# EAGLE board gadtoanalog (EAGLE 6.2)
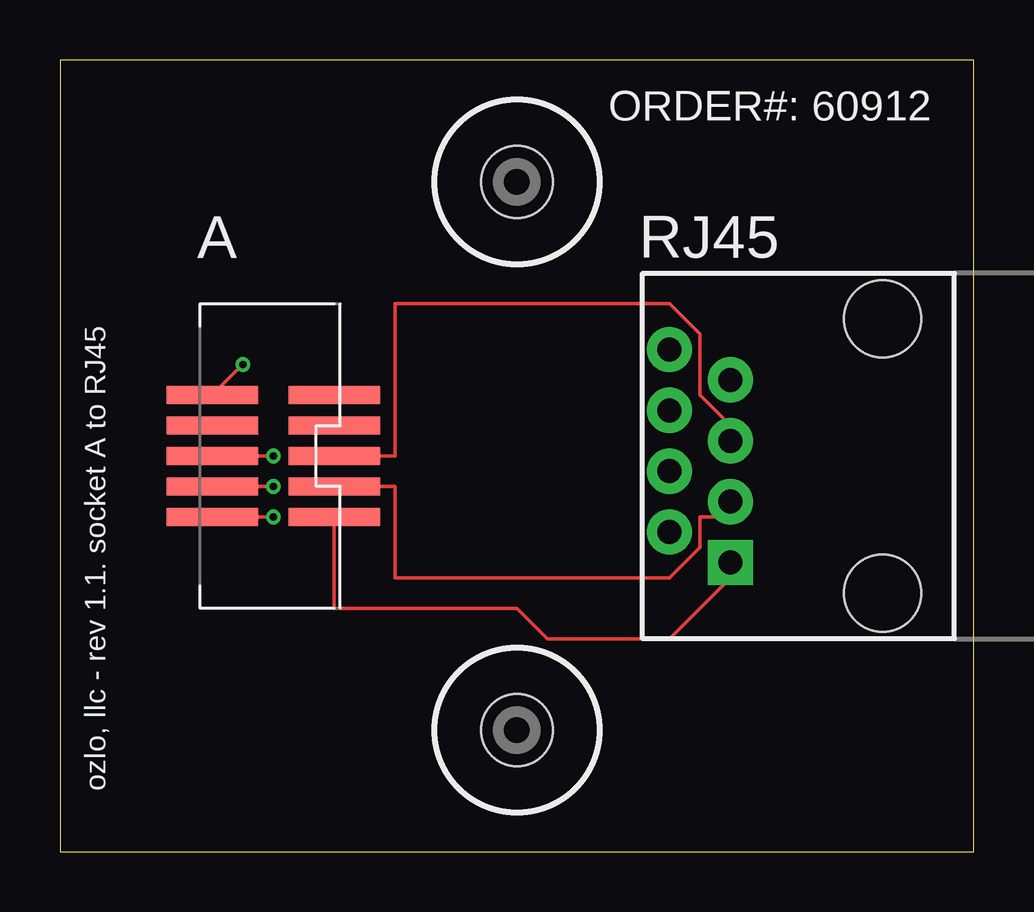
[diagram p0: board, top side]
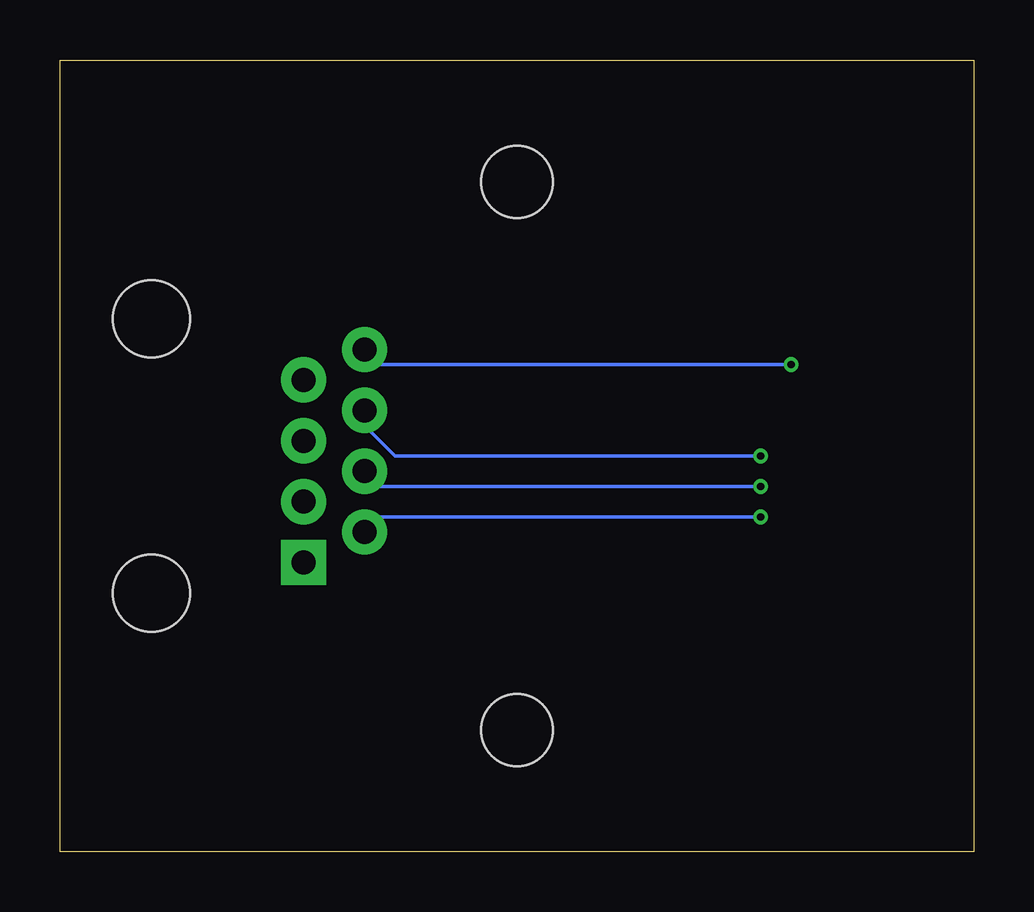
[diagram p1: board, bottom side, seen from below]

Size 38.1 x 33.02 mm. Coordinates in mm from the lower left corner, seen from the top.
Outline: 0,0 38.1,0 38.1,33.02 0,33.02 0,0
Copper layers (1*16): Top 0.035mm / dielectric 1.5mm / Bottom 0.035mm
Design rules: minimum track width 6mil, minimum drill 12mil, track to track 6mil, track to pad 6mil, pad to pad 6mil, via to via 6mil, smd to smd 0mil, copper to edge 10mil, drill to drill 10mil, minimum pad ring 10mil, minimum via ring 6mil, stop-mask expansion 2mil, vias tented up to drill 100mil, thermal gap 10mil

## Footprints (pad centres in the part's own frame; a part is rotated, then mirrored left to right if it is on the bottom)
SHF105DSM = smd 3.81 x 0.737: 1 -2.54,2.54; 2 2.54,2.54; 3 -2.54,1.27; 4 2.54,1.27; 5 -2.54,0; 6 2.54,0; 7 -2.54,-1.27; 8 2.54,-1.27; 9 -2.54,-2.54; 10 2.54,-2.54
RJ45-8 = drill 1 pad 1.88 square: 1 -4.445,6.35 | drill 1 pad 1.88: 2 -3.175,8.89; 3 -1.905,6.35; 4 -0.635,8.89; 5 0.635,6.35; 6 1.905,8.89; 7 3.175,6.35; 8 4.445,8.89 | hole 3.2: -5.715,0; 5.715,0
DRIL-3 = hole 3: 0,0

## Placement (x,y rotation side)
U$1  SHF105SM  [SHF105DSM]  8.89,16.51 180 top
U$2  RJ45-8PTH  [RJ45-8]  34.29,16.51 90 top
U$3  [DRIL-3]  19.05,5.08 0 top
U$4  [DRIL-3]  19.05,27.94 0 top

## Library data of the parts
U$1 = ozlollc
U$2 = SparkFun-Connectors
U$3 U$4 = special

## Nets
+3V3: U$1.1 U$2.1
+5V: U$1.2 U$2.2
GND: U$1.10 U$2.8
N$1: U$1.3 U$2.3
N$2: U$1.4 U$2.4
N$3: U$1.5 U$2.5
N$4: U$1.6 U$2.6

## Tracks (layer width: path | path; a pad name or v marks a point on that pad's centre or on a via)
+3V3
  Top 0.152: U$1.1 11.43,10.16 19.05,10.16 20.32,8.89 25.4,8.89 27.94,11.43 U$2.1
+5V  (via drill 0.3)
  Top 0.152: U$1.2 v8.89,13.97
  Bottom 0.152: v8.89,13.97 25.4,13.97 U$2.2
GND  (via drill 0.3)
  Top 0.152: U$1.10 v7.62,20.32
  Bottom 0.152: v7.62,20.32 25.4,20.32 U$2.8
N$1
  Top 0.152: U$1.3 13.97,15.24 13.97,11.43 25.4,11.43 26.67,12.7 26.67,13.97 27.94,13.97 U$2.3
N$2  (via drill 0.3)
  Top 0.152: U$1.4 v8.89,15.24
  Bottom 0.152: v8.89,15.24 25.4,15.24 U$2.4
N$3
  Top 0.152: U$1.5 13.97,16.51 13.97,22.86 25.4,22.86 26.67,21.59 26.67,19.05 27.94,17.78 U$2.5
N$4  (via drill 0.3)
  Top 0.152: U$1.6 v8.89,16.51
  Bottom 0.152: v8.89,16.51 24.13,16.51 25.4,17.78 U$2.6

## Text on the board
tNames: ORDER#: 60912 | A | RJ45 | ozlo, llc - rev 1.1. socket A to RJ45